# Altium PCB PCB1.PcbDoc
Units mil, origin at the board's own origin, x right, y up, seen from the top; angles counter-clockwise.
Board outline 2165.35 x 6102.36 mil, 2 copper layers (Top Layer, Bottom Layer); 142 components, 117 nets, 421 pads, 346 vias.
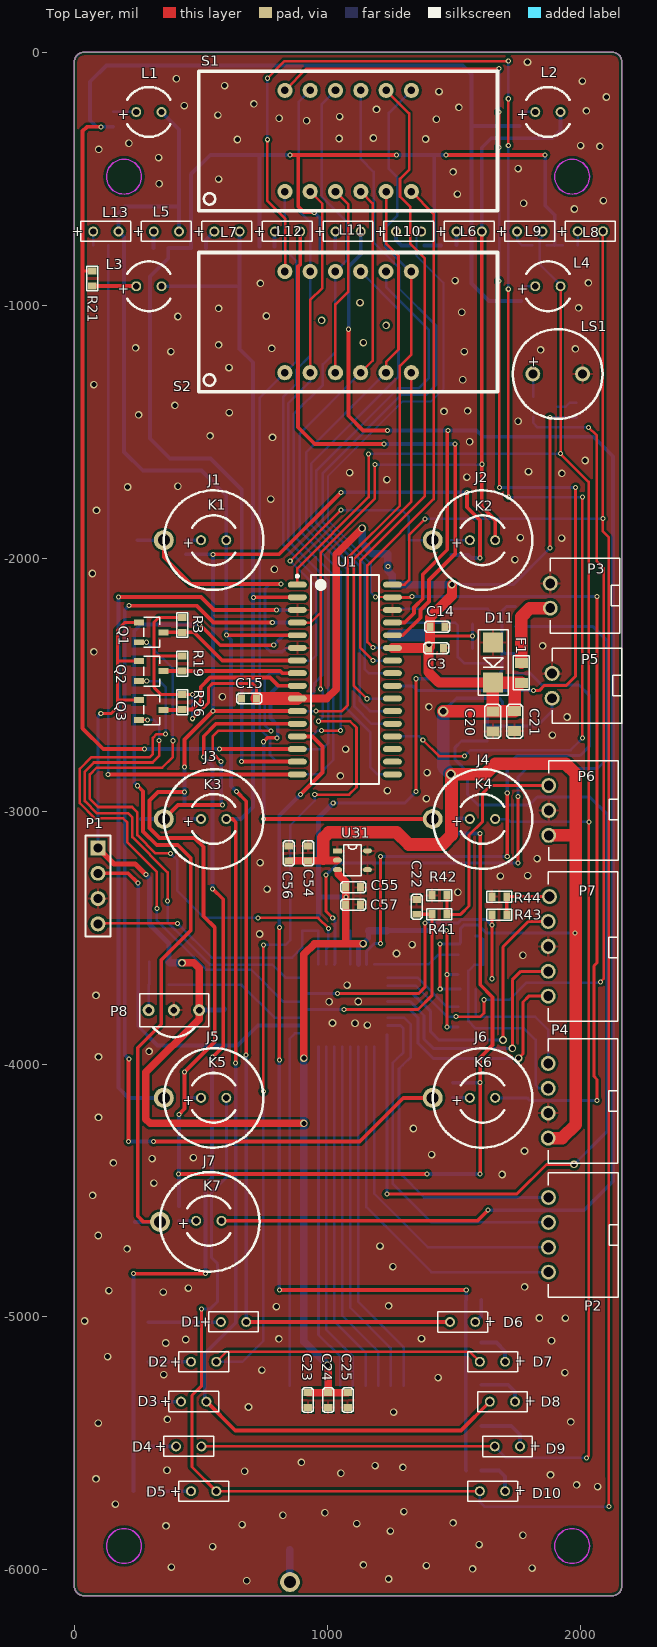
[diagram p0: Top Layer view]
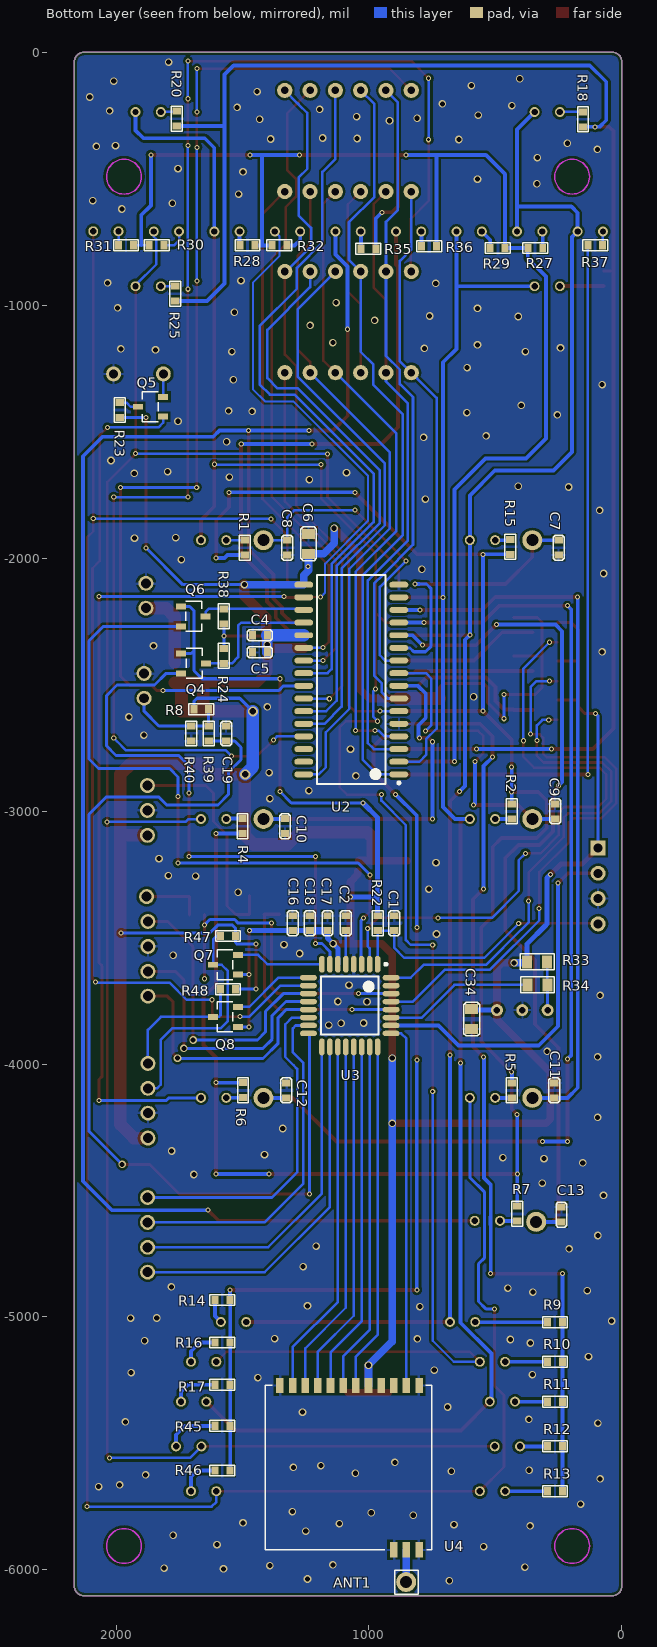
[diagram p1: Bottom Layer view, seen from below]

## Layer stack, top to bottom
Top Layer: signal copper 1.4
Dielectric: dielectric 12.6, FR-4, Dk 4.8
Bottom Layer: signal copper 1.4

## Board outline
0,-6062.99 ccw(c39.37,-6062.99) 39.37,-6102.36 2125.98,-6102.36 ccw(c2125.98,-6062.99) 2165.35,-6062.99 2165.35,-6062.65 2165.35,-39.37 ccw(c2125.98,-39.37) 2125.98,0 39.37,0 ccw(c39.37,-39.37) 0,-39.37

## Design rules (kind name [scope] priority, off if disabled: settings)
Clearance [All] p1: gap=10
PolygonConnect PolygonConnect_1 [isvia] p1: connectstyle=Direct reliefconductorwidth=10 reliefentries=4 polygonreliefangle="90 Angle"
PolygonConnect [All] p2: connectstyle=Relief reliefconductorwidth=10 reliefentries=4 polygonreliefangle="90 Angle"
RoutingVias [All] p1: holewidth=28 width=50 viastyle="Through Hole" minholewidth=28 minwidth=50 maxholewidth=28 maxwidth=50
SilkscreenOverComponentPads [All] p1: minsilkscreentomaskgap=0
SolderMaskExpansion [All] p1: expansion=4
Width [All] p1: maxlimit=200 minlimit=6 preferedwidth=10 minimp=50.000000 maximp=50.000000 favimp=50.000000
27 further rules are at their usual default settings.

## Classes and differential pairs
component class RF: ANT1 C23 C24 C25 C34 C54 C55 C56 C57 P8 R33 R34 U4 U31
component class MCU: C1 C2 C16 C17 C18 P1 R22 U3
component class LED: C3 C14 C15 D1 D2 D3 D4 D5 D6 D7 D8 D9 D10 K1 K2 K3 K4 K5 K6 K7 L1 L2 L3 L4 L5 L6 L7 L8 L9 L10 L11 L12 L13 Q1 Q2 Q3 R1 R2 R3 R4 R5 R6 R7 R9 R10 R11 R12 R13 R14 R15 R16 R17 R18 R19 R20 R21 R25 R26 R27 R28 R29 R30 R31 R32 R35 R36 R37 R45 R46 U1
component class INTERFACE: C19 C20 C21 C22 D11 F1 P2 P3 P4 P5 P6 P7 Q7 Q8 R8 R39 R40 R41 R42 R43 R44 R47 R48
component class TouchPad: C4 C5 C6 C7 C8 C9 C10 C11 C12 C13 J1 J2 J3 J4 J5 J6 J7 LS1 Q1 Q4 Q6 R23 R24 R38 S1 S2 U2

## Components (designator, comment, footprint, x,y, rotation, side; value= is the part's Value field where it differs from the comment)
ANT1 "TP" ANT_TH 853,-6048 r270 bottom
C1 "0.1uF/16V" 0603C 901,-3473 r90 bottom
C2 "2.2uF/6.3V" 0603C 1092,-3413.94 r270 bottom
C3 "0.1uF/16V" 0603C 1401,-2356 r0 top
C4 "0.1uF/16V" 0603C 1402.13,-2305 r0 bottom
C5 "0.01uF/16V" 0603C 1402.13,-2373 r0 bottom
C6 "22uF/16V" 0805C 1239,-1983 r90 bottom
C7 "10PF/16V" 0603C 250,-1988 r90 bottom
C8 "10PF/16V" 0603C 1323,-1988 r90 bottom
C9 "10PF/16V" 0603C 264,-2972 r270 bottom
C10 "10PF/16V" 0603C 1332,-3089.06 r90 bottom
C11 "10PF/16V" 0603C 267,-4075 r270 bottom
C12 "10PF/16V" 0603C 1327,-4075 r270 bottom
C13 "10PF/16V" 0603C 239,-4566 r270 bottom
C14 "0.1uF/16V" 0603C 1406,-2271 r0 top
C15 "10uF/16V" 0603C 721,-2555 r180 top
C16 "0.1uF/16V" 0603C 1302,-3473 r90 bottom
C17 "0.1uF/16V" 0603C 1164,-3473 r90 bottom
C18 "10uF/16V" 0603C 1235,-3473 r90 bottom
C19 "0.1uF/16V" 0603C 1565,-2723.06 r90 bottom
C20 "22uF/16V" 0805C 1655,-2606 r270 top
C21 "10uF/16V" 0805C 1741,-2605 r270 top
C22 "0.1uF/16V" 0603C 1354,-3408 r90 top
C23 "0.1uF/16V" 0603C 924,-5299 r270 top
C24 "0.10uF/16V" 0603C 1004,-5299 r270 top
C25 "10uF/16V" 0603C 1081,-5299 r270 top
C34 "22uF/16V" 0805C 594,-3783 r270 bottom
C54 "0.1uF/10V" 0603C 925,-3197 r90 top
C55 "0.1uF/10V" 0603C 1073,-3302 r0 top
C56 "10uF/10V" 0603C 849,-3138 r270 top
C57 "10uF/10V" 0603C 1132,-3370 r180 top
D1 "LED0" LED_DIP_257MM 579.92,-5019.68 r0 top locked
D2 "LED0" LED_DIP_257MM 461.81,-5177.17 r0 top locked
D3 "LED0" LED_DIP_257MM 422.44,-5334.65 r0 top locked
D4 "LED0" LED_DIP_257MM 402.76,-5511.81 r0 top locked
D5 "LED0" LED_DIP_257MM 461.81,-5688.98 r0 top locked
D6 "LED0" LED_DIP_257MM 1585.43,-5019.68 r180 top locked
D7 "LED0" LED_DIP_257MM 1703.54,-5177.17 r180 top locked
D8 "LED0" LED_DIP_257MM 1742.91,-5335 r180 top locked
D9 "LED0" LED_DIP_257mm 1762.6,-5511.81 r180 top locked
D10 "LED0" LED_DIP_257mm 1703.54,-5688.98 r180 top locked
D11 "SMA6.5CA" SMA 1656,-2334 r270 top
F1 "500mA" 0805R 1768,-2493 r90 top
J1 "TP" TOUCHU_PAD 551.18,-1929.13 r0 top locked
J2 "TP" TOUCHU_PAD 1614.17,-1929.13 r0 top locked
J3 "TP" TOUCHU_PAD 551.18,-3031.5 r0 top locked
J4 "TP" TOUCHU_PAD 1614.17,-3031.5 r0 top locked
J5 "TP" TOUCHU_PAD 551.18,-4133.86 r0 top locked
J6 "TP" TOUCHU_PAD 1614.17,-4133.86 r0 top locked
J7 "TP" TOUCHU_PAD 536,-4624 r0 top locked
K1 "LED0" LED_DIP_5MM 501.18,-1929.13 r0 top locked
K2 "LED0" LED_DIP_5MM 1564.17,-1929.13 r0 top locked
K3 "LED0" LED_DIP_5MM 501.18,-3031.5 r0 top locked
K4 "LED0" LED_DIP_5MM 1564.17,-3031.5 r0 top locked
K5 "LED0" LED_DIP_5MM 501.18,-4133.86 r0 top locked
K6 "LED0" LED_DIP_5MM 1564.17,-4133.86 r0 top locked
K7 "LED0" LED_DIP_5MM 482,-4620 r0 top
L1 "LED0" LED_DIP_5mm 245.28,-236.22 r0 top locked
L2 "LED0" LED_DIP_5mm 1822.83,-236.22 r0 top locked
L3 "LED0" LED_DIP_5mm 245.28,-925.2 r0 top locked
L4 "LED0" LED_DIP_5mm 1822.83,-925.2 r0 top locked
L5 "LED0" LED_DIP_257MM 314.57,-708.66 r0 top locked
L6 "LED0" LED_DIP_257MM 1511.42,-708.66 r0 top locked
L7 "LED0" LED_DIP_257MM 553.94,-708.66 r0 top
L8 "LED0" LED_DIP_257MM 1750.79,-708.66 r0 top locked
L9 "LED0" LED_DIP_257MM 1990.16,-708.03 r0 top locked
L10 "LED0" LED_DIP_257MM 1272.05,-708.66 r0 top
L11 "LED0" LED_DIP_257MM 1032.68,-708.66 r0 top
L12 "LED0" LED_DIP_257MM 793.31,-708.66 r0 top
L13 "LED0" LED_DIP_257MM 75.2,-708.66 r0 top locked
LS1 "Buzzer" BUFFER_0905 1813,-1272 r0 top
P1 "Header 4" HDR1X4 94,-3146 r270 top
P2 "Header 4" 4-2.5MM-W 1875,-4823 r90 top
P3 "Header 2" 2-2.5MM-W 1882,-2198 r90 top
P4 "Header 4" 4-2.5MM-W 1874,-4293 r90 top
P5 "Header 2" 2-2.5MM-W 1889,-2554 r90 top
P6 "Header 3" 3-2.5MM-W 1876,-3096 r90 top
P7 "Header 5" 5-2.5MM-W 1874,-3732 r90 top
P8 "VS1838B" VS1838B 294,-3787 r0 top
Q1 "SI2306." SOT23-3 255.31,-2253.91 r180 top
Q2 "HY0320" SOT23-3 255.31,-2407.46 r180 top
Q3 "HY0320" SOT23-3 255.31,-2561 r180 top
Q4 "SI2306." SOT23-3 1742.43,-2377 r0 bottom
Q5 "S8050" SOT23-3 1814,-1441 r180 bottom
Q6 "SI2306." SOT23-3 1744,-2191 r0 bottom
Q7 "SI2306." SOT23-3 1518,-3647 r180 bottom
Q8 "SI2306." SOT23-3 1518,-3853 r180 bottom
R1 "1.5K" 0603R 1491,-1928.94 r270 bottom
R2 "1.5K" 0603R 436,-3031.06 r90 bottom
R3 "10K" 0603R 428,-2235 r270 top
R4 "1.5K" 0603R 1500,-3030 r270 bottom
R5 "1.5K" 0603R 435,-4134 r90 bottom
R6 "1.5K" 0603R 1498,-4133.06 r90 bottom
R7 "1.5K" 0603R 414,-4621 r90 bottom
R8 "100K" 0603R 1692.65,-2598 r180 bottom
R9 "1.5K" 0603R 294,-5021 r180 bottom
R10 "1.5K" 0603R 294,-5177 r180 bottom
R11 "1.5K" 0603R 294,-5335 r180 bottom
R12 "1.5K" 0603R 294,-5512 r180 bottom
R13 "1.5K" 0603R 294,-5689 r180 bottom
R14 "1.5K" 0603R 1609,-4933 r180 bottom
R15 "1.5K" 0603R 441,-1926 r270 bottom
R16 "1.5K" 0603R 1609,-5101 r180 bottom
R17 "1.5K" 0603R 1609,-5268 r180 bottom
R18 "1.5K" 0603R 154,-236 r270 bottom
R19 "10K" 0603R 428,-2387.5 r270 top
R20 "1.5K" 0603R 1760,-233 r270 bottom
R21 "1.5K" 0603R 72,-924 r90 top
R22 "10K" 0603R 965.65,-3473 r90 bottom
R23 "1K" 0603R 1985,-1444 r90 bottom
R24 "4.7K" 0603R 1574,-2416 r90 bottom
R25 "1.5K" 0603R 1766,-925 r270 bottom
R26 "10K" 0603R 428,-2540 r270 top
R27 "1.5K" 0603R 313,-774 r0 bottom
R28 "1.5K" 0603R 1510,-763 r180 bottom
R29 "1.5K" 0603R 521,-774 r180 bottom
R30 "1.5K" 0603R 1810,-763 r0 bottom
R31 "1.5K" 0603R 1990,-763 r180 bottom
R32 "1.5K" 0603R 1325,-764 r0 bottom
R33 "10K" 0805R 296,-3596 r0 bottom
R34 "100" 0805R 294.26,-3687 r0 bottom
R35 "1.5K" 0603R 1032,-777 r180 bottom
R36 "1.5K" 0603R 792,-768 r180 bottom
R37 "1.5K" 0603R 76,-763 r0 bottom
R38 "4.7K" 0603R 1574,-2201 r270 bottom
R39 "100" 0603R 1633.65,-2723.06 r90 bottom
R40 "100K" 0603R 1702.65,-2664 r270 bottom
R41 "100" 0603R 1414,-3408.35 r0 top
R42 "100K" 0603R 1473,-3333 r180 top
R43 "100" 0603R 1651,-3410 r0 top
R44 "100K" 0603R 1710,-3338 r180 top
R45 "1.5K" 0603R 1609,-5431 r180 bottom
R46 "1.5K" 0603R 1609,-5607 r180 bottom
R47 "4.7K" 0603R 1587,-3494 r180 bottom
R48 "4.7K" 0603R 1587,-3704 r180 bottom
S1 "SEG_4_0.36" DISPLAY_0.36INCH_4 833,-151 r0 top locked
S2 "SEG_4_0.36" DISPLAY_0.36INCH_4 832.68,-867 r0 top locked
U1 "TM1629A" SOP127P1040X265-32N 1070,-2480 r0 top
U2 "TM1648A" SOP127P1040X265-32N 1070,-2480 r0 bottom
U3 "STM8S003K3T6C" QFP80P900X900X245-32N 1076,-3769 r270 bottom
U4 "HW3000" HW3000 802,-5271 r270 bottom
U31 "TLV70433DBVT" SOT23-5(DBV) 1041,-3157 r0 top

## Footprints (in the part's own frame and the unit in brackets; to place one, negate y for a bottom-side part, rotate by r counter-clockwise, add the part's x,y. Pads: shape width x height; smd on the part's side, far side on the other; paste and mask are expansions set on the pad)
2-2.5MM-W [mm]
  round 1.5 hole 1: 1(0,0) 2(2.5,0)
  silkscreen extent -2.5,-7 5,0
3-2.5MM-W [mm]
  round 1.5 hole 1: 1(0,0) 2(2.5,0) 3(5,0)
  silkscreen extent -2.5,-7 7.5,0
4-2.5MM-W [mm]
  round 1.5 hole 1: 1(0,0) 2(2.5,0) 3(5,0) 4(7.5,0)
  silkscreen extent -2.5,-7 10,0
5-2.5MM-W [mm]
  round 1.5 hole 1: 1(0,0) 2(2.5,0) 3(5,0) 4(7.5,0) 5(10,-0.127)
  silkscreen extent -2.5,-7 12.5,0
0603C [mm]
  rect 0.7x0.85 smd: 1(0,0) 2(1.5,0)
  silkscreen extent -0.5,-0.55 2,0.55
0603R [mm]
  rect 0.7x0.85 smd: 1(0,0) 2(1.5,0)
  silkscreen extent -0.5,-0.55 2,0.55
0805C [mm]
  rect 1x1.3 smd: 1(0,0) 2(2,0)
  silkscreen extent -0.7,-0.8 2.7,0.8
0805R [mm]
  rect 1x1.3 smd: 1(0,0) 2(2,0)
  silkscreen extent -0.7,-0.8 2.7,0.8
ANT_TH [mm]
  round 2 hole 1.2: 1(0,0)
  silkscreen extent -1.19,-1.17 1.24,1.19
BUFFER_0905 [mm]
  round 1.5 hole 0.9: 1(0,0) 2(5,0)
  silkscreen extent -2,-4.5 7,4.5
DISPLAY_0.36INCH_4 [mil]
  round 60 hole 30: 1(0,-400) 2(100,-400) 3(200,-400) 4(300,-400) 5(400,-400) 6(500,-400) 7(500,0) 8(400,0) 9(300,0) 10(200,0) 11(100,0) 12(0,0)
  silkscreen extent -341,-476 841,76
HDR1X4 [mm] "Connector; Header; 4 Position"
  rect 1.5x1.5 hole 0.9: 1(0,0)
  round 1.5 hole 0.9: 2(2.54,0) 3(5.08,0) 4(7.62,0)
  silkscreen extent -1.27,-1.27 8.89,1.27
HW3000 [mil]
  rect 60x30 smd: 1(0,0) 2(0,-50) 3(0,-100) 4(0,-150) 5(0,-200) 6(0,-250) 7(0,-300) 8(0,-350) 9(0,-400) 10(0,-450) 11(0,-500) 12(0,-550) 13(649.61,-100) 14(649.61,-50) 15(649.61,0)
  silkscreen extent 0,-607 650,50
LED_DIP_5MM [mm]
  round 1 hole 0.635: 1(0,0) 2(2.54,0)
  silkscreen extent -0.9,-2.5 3.44,2.5
LED_DIP_5mm [mm]
  round 1 hole 0.635: 1(0,0) 2(2.54,0)
  silkscreen extent -0.9,-2.5 3.44,2.5
LED_DIP_257MM [mm]
  round 1 hole 0.635: 1(0,0) 2(2.54,0)
  silkscreen extent -1.24,-1 3.77,1.02
LED_DIP_257mm [mm]
  round 1 hole 0.635: 1(0,0) 2(2.54,0)
  silkscreen extent -1.24,-1 3.77,1.02
QFP80P900X900X245-32N [mm] "QFP, 32-Leads, Body 9.2x9.2mm (max), Pitch 0.80mm, IPC Medium Density"
  oval 1.7x0.55 smd: 1(-4.15,2.8) 2(-4.15,2) 3(-4.15,1.2) 4(-4.15,0.4) 5(-4.15,-0.4) 6(-4.15,-1.2) 7(-4.15,-2) 8(-4.15,-2.8) 17(4.15,-2.8) 18(4.15,-2) 19(4.15,-1.2) 20(4.15,-0.4) 21(4.15,0.4) 22(4.15,1.2) 23(4.15,2) 24(4.15,2.8)
  oval 0.55x1.7 smd: 9(-2.8,-4.15) 10(-2,-4.15) 11(-1.2,-4.15) 12(-0.4,-4.15) 13(0.4,-4.15) 14(1.2,-4.15) 15(2,-4.15) 16(2.8,-4.15) 25(2.8,4.15) 26(2,4.15) 27(1.2,4.15) 28(0.4,4.15) 29(-0.4,4.15) 30(-1.2,4.15) 31(-2,4.15) 32(-2.8,4.15)
  silkscreen extent -4.27,-2.9 2.9,3.75, body extent -3.5,-3.5 3.5,3.5, height 2.45
SMA [mm]
  rect 2x2 smd: 1(0,0) 2(4,0)
  silkscreen extent -1.3,-1.5 5.3,1.5
SOP127P1040X265-32N [mm] "SOP, 32-Leads, Body 21.0x7.6mm (max), Pitch 1.27mm, IPC Medium Density"
  oval 1.9x0.6 smd: 1(-4.775,9.525) 2(-4.775,8.255) 3(-4.775,6.985) 4(-4.775,5.715) 5(-4.775,4.445) 6(-4.775,3.175) 7(-4.775,1.905) 8(-4.775,0.635) 9(-4.775,-0.635) 10(-4.775,-1.905) 11(-4.775,-3.175) 12(-4.775,-4.445) 13(-4.775,-5.715) 14(-4.775,-6.985) 15(-4.775,-8.255) 16(-4.775,-9.525) 17(4.775,-9.525) 18(4.775,-8.255) 19(4.775,-6.985) 20(4.775,-5.715) 21(4.775,-4.445) 22(4.775,-3.175) 23(4.775,-1.905) 24(4.775,-0.635) 25(4.775,0.635) 26(4.775,1.905) 27(4.775,3.175) 28(4.775,4.445) 29(4.775,5.715) 30(4.775,6.985) 31(4.775,8.255) 32(4.775,9.525)
  silkscreen extent -4.9,-10.5 3.42,10.5, body extent -3.81,-10.49 3.81,10.49, height 2.65
SOT23-3 [mm]
  rect 1x0.6 smd: 1(0,0) 2(0,2) 3(-2.5,1)
  silkscreen extent -2.1,-0.5 -0.5,2.5
SOT23-5(DBV) [mm]
  rect 0.9x0.5 smd: 1(0,0)
  oval 0.9x0.5 smd: 2(0,-0.95) 3(0,-1.9) 4(3,-1.9) 5(3,0)
  silkscreen extent 0.6,-2.5 2.4,0.6
TOUCHU_PAD [mm]
  round 2 hole 1.2: 1(-5,0)
  silkscreen extent -5,-5 5,5
VS1838B [mm]
  round 1.2 hole 0.65: 1(0,0) 2(2.54,0) 3(5.08,0)
  silkscreen extent -0.89,-2.71 6.02,1.65

## Part data
C1 C2 C3 C4 C5 C6 C7 C8 C9 C10 C11 C12 C13 C14 C15 C16 C17 C18 C19 C20 C21 C22 C23 C24 C25 C54 C55 C56 C57: library part Cap, "Capacitor"
C34: library part Cap2, "Capacitor"
D1 D2 D3 D4 D5 D6 D7 D8 D9 D10 K1 K2 K3 K4 K5 K6 K7 L1 L2 L3 L4 L5 L6 L7 L8 L9 L10 L11 L12 L13: "Typical INFRARED GaAs LED"
D11: library part "D Schottky", "Schottky Diode"
F1: library part "Fuse 1", "Fuse"
J1 J2 J3 J4 J5 J6 J7: library part TOUCH_PAD, "TEST_3P"
LS1: "Magnetic Transducer Buzzer"
P1 P2 P4: "Header, 4-Pin"
P3 P5: "Header, 2-Pin"
P6: "Header, 3-Pin"
P7: "Header, 5-Pin"
P8: library part "Header 3", "Header, 3-Pin"
Q1 Q2 Q3 Q4 Q6 Q7 Q8: library part BUK92150-55A, "BUK92150-55A"
Q5: library part NPN, "NPN Bipolar Transistor"
R1 R2 R4 R5 R6 R7 R8 R9 R10 R11 R12 R13 R14 R15 R16 R17 R18 R20 R21 R22 R23 R24 R25 R27 R28 R29 R30 R31 R32 R35 R36 R37 R38 R39 R40 R41 R42 R43 R44 R45 R46 R47 R48: library part Res1, "Resistor"
R3 R19 R26: library part Res2, "Resistor"
R33 R34: library part R, "R"
U31: library part TPS76318

## Via types
v1: diameter 30, hole 20, Top Layer to Bottom Layer, tented both sides, 188 vias
v2: diameter 20, hole 12, Top Layer to Bottom Layer, tented both sides, 156 vias
v3: diameter 40, hole 25, Top Layer to Bottom Layer, tented both sides, 2 vias

## Nets (pads, with @x,y where several pads share a name; then routed paths per layer and width w, separated by ;. In a path a pad name is that pad's centre, name@x,y a point inside that pad or via, vN(x,y) a via of type N, cw(c..) or ccw(c..) an arc to the next point about the centre after c; other vN are vias at no path point)
AD: C19.1 R39.1 U3.16 | length 3813.1
  Top Layer w12: v2(1236,-4514) 1750,-4514 1867,-4397 v1(1976,-4397)
  Bottom Layer w12: v2(1236,-4514) U3.16@1236,-3882.62 ; R39.1 C19.1 1530.94,-2723.06 1506,-2748 1506,-2797 1555,-2846 1555,-2934 1597,-2976 1799.68,-2976 1831,-2944.68 2038.68,-2944.68 2107,-3013 2107,-4266 v1(1976,-4397)
BUZZER: Q5.1 U3.10 | length 3453.5
  Top Layer w10: v2(1510,-3813) 1606,-3813 1620,-3799 v2(1620,-3746) ; v2(2034,-1483) 2065,-1514 2065,-2012 2093,-2040 2093,-3663 v2(2081,-3675)
  Bottom Layer w10: U3.10 1350.26,-3690.26 1473,-3813 v2(1510,-3813) ; v2(1620,-3746) 1721,-3746 1788.9,-3678.1 2077.9,-3678.1 v2(2081,-3675) ; Q5.1 1814,-1465 1832,-1483 v2(2034,-1483)
CLK: Q2.2 U3.29 | length 2257.2
  Top Layer w10: Q2.2 v2(286.8,-2486.2) ; v2(327,-3386) 327,-3349 ; 327,-3363 327,-3349 ; v2(361,-2695) 360,-2696 325.64,-2696 311,-2710.64 311,-2774 297,-2788 67,-2788 22,-2833 22,-2968.57 82.43,-3029 193.96,-3029 209.96,-3045 209.96,-3123.96 327,-3241 327,-3349
  Bottom Layer w10: v2(286.8,-2486.2) 337.2,-2486.2 361,-2510 v2(361,-2695) ; v2(327,-3386) 327,-3432 522,-3627 700,-3627 826.25,-3753.25 U3.29
DIG1: S1.6 U2.22 | length 2033.1
  Top Layer w10: v2(1181,-2354) 1159,-2332 1159,-2175 1159,-2029 1421,-1767 1421,-639 S1.6
  Bottom Layer w10: v2@1182,-2355 U2.22
DIG2: S1.8 U2.23 | length 2549.7
  Top Layer w10: v2(1181,-2405) 1131,-2355 1131,-2010 1385,-1756 1385,-814 1329,-758 1329,-612 1288,-571 1288,-501 1324,-465 1324,-242 S1.8
  Bottom Layer w10: v2(1181,-2405) U2.23
DIG3: S1.9 U2.24 | length 2841
  Bottom Layer w10: S1.9 1133,-422 1184,-473 1184,-751.28 1285,-852.28 1285,-935 1432,-1082 1432,-1314 1392,-1354 1294,-1354 982,-1666 982,-1830 982,-1857.72 1148,-2023.72 1148,-2179 1148,-2439 1164,-2455 U2.24
DIG4: S1.12 U2.25 | length 4341.1
  Top Layer w10: S1.12 919,-65 v2(1680,-65) ; v2@1680,-1720 v2(1680,-905) ; v2(1680,-376) v2(1680,-237)
  Top Layer w12: v2(1815,-2524) 1838,-2524 1859,-2503 1946,-2503 1982,-2467 1982,-2182 v2(1982,-1720)
  Bottom Layer w10: v2(1680,-905) v2(1680,-376) ; v2(1680,-237) v2(1680,-65)
  Bottom Layer w12: U2.25 1338,-2505 1357,-2524 v2(1815,-2524) ; v2(1681,-1720) v2(1982,-1720)
DIG5: S2.6 U2.26 | length 1533.3
  Top Layer w10: v2(1157,-2556) 1106,-2505 1106,-2031 1106,-2003 1332.68,-1776.32 1332.68,-1749.32 ; 1332.68,-1720 1332.68,-1749.32 ; S2.6 1332.68,-1749.32
  Bottom Layer w10: v2(1157,-2556) U2.26@1256.99,-2556
DIG6: S2.8 U2.27 | length 2216.1
  Bottom Layer w10: S2.8 1232.68,-928.68 1402,-1098 1402,-1288 1361,-1329 1281,-1329 957,-1653 957,-1826 957,-1861 1128,-2032 1128,-2146 1128,-2564 1169,-2605 U2.27
DIG7: S2.9 U2.28 | length 2173.7
  Bottom Layer w10: S2.9 1282,-1016.32 1282,-1281.32 937,-1626.32 937,-1870 1108,-2041 1108,-2487 1108,-2587 1176,-2655 U2.28
DIG8: S2.12 U2.29 | length 5557.3
  Top Layer w10: v2(764,-346) 764,-588 835,-659 835,-864.68 S2.12 ; v2(764,-103) 832,-35 v2(1716,-35) ; v2(1378,-2719) 1442,-2783 v2(1543,-2783) ; v2(1716,-1759) v2(1716,-937) ; v2(1716,-368) v2(1716,-184) ; v2(2009,-2712) v2(2009,-1759)
  Bottom Layer w10: v2(764,-346) v2(764,-103) ; U2.29 1364,-2705 v2(1378,-2719) ; v2(1543,-2783) 1567,-2759 1962,-2759 1997,-2724 v2(2009,-2712) ; v2(1716,-1759) v2(2009,-1759) ; v2(1716,-937) v2(1716,-368) ; v2(1716,-184) v2(1716,-35)
DIO: Q1.2 U3.2 | length 2404.2
  Top Layer w10: Q1.2 v2@282,-2332.65 ; v2(381,-3167) 322,-3167 249.96,-3094.96 249.96,-3005 228.96,-2984 94,-2984 62,-2952 62,-2855 89,-2828 348,-2828 390,-2786 v2(390,-2722) ; v2(727,-3422) 964,-3422 1007,-3465 v2(1005,-3465)
  Bottom Layer w10: v2(286,-2332.65) 390,-2436.65 v2(390,-2722) ; v2(381,-3167) 408,-3194 408,-3316 514,-3422 v2(727,-3422) ; U3.2 997.26,-3542.74 1005,-3535 v2(1005,-3465)
FEED: R43.1 U3.30 | length 1270.6
  Top Layer w12: v2(1041.24,-3721.76) 1361.24,-3721.76 1386,-3697 v2(1386,-3443) ; v2(1651,-3663) v2(1651,-3451) R43.1
  Bottom Layer w12: U3.30 v2(1041.24,-3721.76) ; v2(1386,-3443) 1516.83,-3443 1530.83,-3429 1629,-3429 v2(1651,-3451)
GND: C1.2 C2.1 C3.2 C4.2 C5.2 C6.2 C7.1 C8.1 C9.1 C10.1 C11.1 C12.1 C13.1 C14.2 C15.2 C16.2 C17.2 C18.2 C19.2 C20.2 C21.2 C22.2 C23.2 C24.2 C25.2 C34.2 C54.2 C55.2 C56.1 C57.1 D11.1 LS1.2 P1.3 P3.2 P4.2 P5.2 P6.2 P7.3 P8.2 R40.2 R42.2 R44.2 U1.3 U1.6 U1.30 U2.5 U2.16 U3.4 U4.1 U4.12 U4.13 U4.15 U31.1 U31.4 U31.5
  other v1: 682,-6043 1243,-6036 1575,-5996 1810,-5993 384,-5989 1392,-5983 1143,-5980 547,-5908 1601,-5900 1774,-5863 1250,-5847 363,-5826 664,-5821 1117,-5817 1498,-5814 825,-5784 991,-5774 1303,-5770 163,-5740 2069,-5671 1986,-5664 86,-5640 1883,-5624 1054,-5618 674,-5610 367,-5606 1299,-5595 1190,-5588 898,-5575 95,-5420 1963,-5415 368,-5405 1263,-5376 689,-5356 1439,-5240 354,-5228 1940,-5220 742,-5210 132,-5157 362,-5103 1887,-5094 441,-5089 809,-5087 1373,-5086 41,-5016 1942,-5005 1839,-5004 799,-4959 1243,-4956 352,-4902 137,-4896 451,-4886 1781,-4881 1260,-4801 209,-4731 1209,-4720 95,-4678 73,-4519 315,-4471 1692,-4437 155,-4391 308,-4374 471,-4370 1413,-4358 1780,-4344 1341,-4255 96,-4211 96,-3972 296,-3950 1159,-3846 1110,-3839 1021,-3838 1008,-3754 1123,-3753 86,-3729 1079,-3688 1774,-3570 1274,-3563 1336,-3528 733,-3486 1517,-3321 763,-3309 1685,-3257 1793,-3255 735,-3204 1830,-3188 1392,-2951 1238,-2919 1052,-2861 1395,-2848 1073,-2755 1890,-2700 1949,-2628 1402,-2588 586,-2548 78,-2371 1852,-2347 72,-2061 791,-2044 1742,-2006 1927,-1921 1764,-1919 88,-1811 777,-1767 211,-1719 410,-1716 1236,-1690 1552,-1680 1928,-1665 1089,-1662 1796,-1658 2020,-1614 1563,-1540 784,-1523 537,-1517 1755,-1459 255,-1434 613,-1425 1462,-1420 1555,-1418 398,-1396 78,-1314 1536,-1295 612,-1247 382,-1184 1542,-1184 1844,-1177 1981,-1173 781,-1171 243,-1169 571,-1157 410,-1045 760,-1043 1532,-1028 571,-1013 1994,-1011 736,-914 2033,-912 1506,-903 1977,-620 1777,-597 2092,-587 1515,-561 336,-520 571,-502 1498,-473 1755,-460 334,-417 97,-384 2078,-372 2002,-369 216,-360 645,-345 1389,-343 1047,-341 1183,-339 919,-271 1432,-265 810,-261 1049,-255 568,-249 2025,-232 1195,-226 1521,-218 435,-211 710,-204 2104,-177 1442,-156 595,-132 2009,-114 404,-105 1792,-39
IN: C22.1 R41.1 U3.28 | length 906.1
  Top Layer w12: v2(1067.25,-3784.75) 1359.25,-3784.75 1413.65,-3730.35 R41.1@1413.65,-3408 ; C22.1 R41.1@1413.65,-3408 ; R41.1 R41.1@1413.65,-3408
  Bottom Layer w12: U3.28 v2(1067.25,-3784.75)
IRLED: R34.2 U3.27 | length 593.1
  Bottom Layer w10: R34.2 662,-3687 791.24,-3816.24 U3.27
K3: P2.4 U3.14 | length 1349.7
  Bottom Layer w10: U3.14 1304.24,-3816.24 1331,-3843 1331,-3972 1298,-4005 1284,-4019 1284,-4428 1298.35,-4442.35 ; 1291.08,-4435.08 1383.72,-4527.72 P2.4
K4: P2.2 U3.17 | length 1356.6
  Bottom Layer w10: U3.17 1186.24,-4512.24 1398.57,-4724.57 P2.2
K6: P2.1 U3.18 | length 1460.2
  Bottom Layer w10: U3.18 1154.74,-4565.74 1412,-4823 P2.1
K7: P2.3 U3.15 | length 1376.5
  Bottom Layer w10: U3.15 1289.74,-3847.74 1301,-3859 1301,-3954 1277,-3978 1259,-3996 1259,-4472 1413.15,-4626.15 1505,-4626.15 P2.3
KEY1: C7.2 J1.1 U2.11 | length 1137.1
  Top Layer w15: J1.1 354.33,-1996.33 460,-2102 v2(818,-2102)
  Bottom Layer w12: v2(818,-2102) 773,-2102 754,-2121 754,-2348 776.18,-2370.18 822.82,-2370.18 838,-2355 U2.11@870,-2355
  Bottom Layer w15: C7.2@250.19,-1929.13 J1.1 ; 802,-2102 v2(818,-2102) ; U2.11@870,-2355 U2.11
KEY2: C8.2 J2.1 U2.10 | length 1248.6
  Top Layer w10: v2(854,-2011) v2(1055,-1810)
  Bottom Layer w10: v2(854,-2011) 957,-2114 957,-2384 936,-2405 U2.10 ; v2(1055,-1810) 1295,-1810 1323,-1838 C8.2 1417.13,-1928.94 J2.1
KEY3: C9.2 J3.1 U2.9 | length 1224.8
  Top Layer w10: v2(581,-2804) 548,-2771 548,-2704 569,-2683 v2@777.3,-2683
  Top Layer w15: J3.1 409.83,-2976 v2(586,-2976)
  Bottom Layer w10: v2(777.3,-2683.3) 753,-2659 753,-2477 775,-2455 U2.9
  Bottom Layer w15: C9.2@264.44,-3031.5 J3.1 ; v2(581,-2804) 581,-2971 v2(586,-2976)
KEY4: C10.2 J4.1 U2.8 | length 1423.8
  Top Layer w15: v2(749,-2726) 764.5,-2710.5 v2(801,-2710.5) ; v2@749.5,-3031.5 J4.1
  Bottom Layer w15: v2(748.03,-3031.5) 749,-3030.53 v2(749,-2726) ; v2(801,-2710.5) 804.8,-2706.7 804.8,-2660.8 775.5,-2631.5 775.5,-2535.5 806,-2505 U2.8 ; C10.2@1333.5,-3031.5 J4.1
KEY5: C13.2 J7.1 U2.12 | length 3473.8
  Top Layer w15: v2(251,-2900) 272.46,-2921.46 272.46,-3080.46 326,-3134 409,-3134 461,-3186 461,-3472 344,-3589 344,-3668 ; J7.1 274,-4624 251,-4601 251,-3935.96 344,-3842.96 344,-3668 ; 344,-3637 344,-3668 ; v2(496,-2263) 577.18,-2344.18 v2(788.82,-2344.18)
  Bottom Layer w15: C13.2 J7.1@338.09,-4625.06 ; v2(251,-2900) 237,-2886 237,-2289 263,-2263 v2(496,-2263) ; v2(788.82,-2344.18) 828,-2305 U2.12
KEY6: C12.2 J6.1 U2.13 | length 4444.8
  Top Layer w15: v2(215,-4306) v2@215,-3981 ; 216,-4237 v2(216,-3980) ; v2(216,-2188) 484,-2188 551,-2255 v2(783,-2255) ; v2(314,-4306) 1129,-4306 1301.14,-4133.86 J6.1
  Bottom Layer w15: v2(215,-4306) v2(314,-4306) ; v2(216,-3980) 200,-3964 200,-2204 v2(216,-2188) ; v2(783,-2255) U2.13 ; C12.2 J6.1@1417.13,-4134.06
KEY7: C11.2 J5.1 U2.14 | length 2863.9
  Top Layer w15: v2(175,-2154) 501,-2154 552,-2205 v2(799,-2205)
  Bottom Layer w15: v2(175,-2154) 175,-4094 215.06,-4134.06 C11.2 J5.1@354.13,-4134.06 ; v2(799,-2205) U2.14
LGRID1: D1.2 D6.2 K1.2 L1.2 L5.2 L13.2 U1.5 | length 6616.8
  Top Layer w15: v2@602.36,-2305 U1.5 ; v2(642,-2923) 679.92,-2960.92 v2(679.92,-3964.92) ; D1.2 D6.2
  Bottom Layer w15: L1.2 414.57,-305.51 L5.2 ; 361,-610 304,-610 ; 408.57,-610 304,-610 ; v2(642,-2923) 620,-2901 620,-2322.64 v2(601.18,-2303.82) K1.2 601.18,-1752.18 503,-1654 271,-1654 197,-1580 197,-730.46 L13.2 175.2,-634.8 200,-610 304,-610 ; D1.2 v2(679.92,-3964.92)
LGRID2: D2.2 D7.2 K2.2 L2.2 L6.2 U1.4 | length 7793.6
  Top Layer w10: D2.2 600.98,-5138 1564.38,-5138 D7.2 ; v2(748,-4108) v2(748,-3529) ; U1.4 935,-2255 974,-2216 ; v2(951,-2935) 1087,-2935 1116,-2906 1116,-2670 1091,-2645 v2(966,-2645) ; v2(974,-2517) 974,-2216 ; v2(1189,-1630) 1189,-1705 1189,-1764 974,-1979 974,-2027 974,-2178 974,-2216
  Top Layer w15: L6.2 v2(1611.42,-1629) 1611.42,-1796.42 1664.17,-1849.17 K2.2
  Bottom Layer w10: D2.2 664.83,-5177.17 748,-5094 v2(748,-4108) ; v2(748,-3529) 835,-3529 854,-3510 854,-3056 951,-2959 v2(951,-2935) ; v2(966,-2645) 983,-2628 983,-2593 983,-2526 v2(974,-2517) ; v2(1189,-1630) v2@1611.42,-1630
  Bottom Layer w15: L6.2 1611.42,-377.58 1649,-340 1891.83,-340 1922.83,-309 L2.2
LGRID3: D3.2 D8.2 K3.2 L3.2 L7.2 U1.2 | length 8383.3
  Top Layer w15: D3.2 636.8,-5449 1528.91,-5449 D8.2 ; K3.2 625.5,-3031.5 638.37,-3044.37 638.37,-3219 638.37,-3590 ; v2(638.37,-3996.37) 638.37,-3590 ; 638.37,-3471.37 638.37,-3590 ; v2(708,-2155) U1.2
  Bottom Layer w15: L3.2 653.94,-925.2 ; D3.2 516,-5328.21 516,-5145 638.37,-5022.63 v2(638.37,-3996.37) ; K3.2 659.5,-3031.5 707,-2984 ; L7.2 653.94,-925.2 ; 653.94,-925.2 653.94,-1172.94 707,-1226 ; 707,-2984 707,-2925.68 707,-1226 ; 707,-2984 707,-2155 707,-1226
LGRID4: D4.2 D9.2 K4.2 L4.2 L8.2 U1.1 | length 8245.9
  Top Layer w10: D4.2 D9.2 ; U1.1 882.01,-2040.99 1164,-1759 v2(1164,-1588) ; L4.2 v2(1922.83,-1587) 1922.83,-1588 2034,-1699.17 2034,-5548 v2(2025,-5557)
  Bottom Layer w10: v2(1164,-1588) v2@1922.83,-1588 ; D9.2 1707.79,-5557 v2(2025,-5557) ; K4.2 1713.5,-3031.5 1725,-3043 v2(2035,-3043) ; L8.2 1850.79,-729.54 1840.28,-740.05 1840.28,-838.28 1922.83,-920.83 L4.2
LGRID5: D5.2 D10.2 K5.2 L9.2 U1.32 | length 9387.4
  Top Layer w10: D5.2 D10.2 ; U1.32 1306,-2105 1324,-2087 1324,-1909 v2(1387,-1846) ; L9.2 v2(2090.16,-1844) 2090.16,-1894.16 2113,-1917 2113,-5631 ; v2(2114,-5750) 2114,-5632
  Top Layer w12: v2(504,-4968) 504,-5272 466,-5310 466,-5593.16 D5.2
  Bottom Layer w10: v2@1387,-1844 v2(2090.16,-1844) ; D10.2 1603.54,-5731.54 1622,-5750 v2(2114,-5750)
  Bottom Layer w12: v2(504,-4968) 538,-4968 567,-4939 567,-4790 542.69,-4765.69 542.69,-4507.31 601.18,-4448.82 K5.2
LGRID6: K6.2 L10.2 U1.31 | length 5110.2
  Top Layer w8: v2(1191,-2154) 1256.99,-2154 U1.31
  Top Layer w12: U1.31 v2@1333,-2155 ; v2(2067,-4144) 2067,-4061 2055,-4049 2055,-3612 2067,-3600 v2(2067,-2152)
  Bottom Layer w8: v2(1191,-2154) 1173,-2136 1173,-2100 1173,-2021.85 1004,-1852.85 1004,-1803 1004,-1675 1299,-1380 1411,-1380 1459,-1332 1459,-911 1354,-806 1354,-726.71 L10.2
  Bottom Layer w12: v2(1336,-2152) v2(2067,-2152) ; K6.2 1790.86,-4133.86 1801,-4144 v2(2067,-4144)
LGRID7: K7.2 L11.2 U1.29 | length 7211.1
  Top Layer w15: K7.2 1594,-4620 v2(1636,-4578) ; v2@1084,-1096.35 1084,-1437.36 1141.64,-1495 v2(1238,-1495) ; U1.29 1306.5,-2255 1343.5,-2218 1343.5,-2195.14 ; 1346.74,-2191.91 1377.82,-2160.82 1377.82,-2064.18 1475,-1967 1475,-1648 v2@1475,-1497
  Bottom Layer w15: v2(1085.18,-1095.18) 1085.18,-847.32 1132.68,-799.83 L11.2 ; v2(1238,-1495) v2(1477,-1495) 1591,-1495 1616,-1520 2053,-1520 2130.5,-1597.5 2130.5,-4463.5 2016,-4578 v2(1636,-4578)
LGRID8: L12.2 U1.28 | length 2272.5
  Top Layer w15: L12.2 893.31,-839.2 885.18,-847.32 885.18,-1483.01 951.17,-1549 v2(1225,-1549) ; U1.28@1288,-2305 1299,-2305 1368.5,-2235.5 ; 1368.5,-2230 1368.5,-2205.5 1403,-2171 1403,-2087 1506,-1984 1506,-1691 1506,-1550 v2(1505,-1549)
  Bottom Layer w15: v2(1225,-1549) v2(1505,-1549)
LSEG1: R1.2 R2.2 R4.2 R5.2 R6.2 R7.2 R15.2 U1.11 | length 7847.3
  Top Layer w15: v2(413,-4435) v2(1395,-4435) ; v2(414,-4199) 436,-4177 v2(436,-4031) 556,-3911 556,-3461 511,-3416 511,-3141 476,-3106 337,-3106 297.46,-3066.46 297.46,-2958.54 331,-2925 v2(436,-2925) ; v2(436,-2826) 436,-2716.89 v2(548.94,-2603.94) 880.95,-2603.94 U1.11 U1.11@909.18,-2605 ; v2(548.94,-1985.06) 809.94,-1985.06 v2(1055,-1740) ; U1.11@906,-2605 U1.11@909.18,-2605 ; U1.11@911.5,-2605 U1.11@909.18,-2605 ; v2(1553,-1740) 1553,-1799 1604,-1850 v2(1604,-2000) ; v2(1605,-4435) v2(1605,-4074) 1605,-3974 1654,-3925 1654,-3736 1605,-3687 v2@1605,-3090
  Bottom Layer w15: R7.2 v2(414,-4199) ; R5.2 v2@435,-4032 ; R2.2 v2(436,-2925) v2(436,-2826) ; R15.2 v2(548.94,-1985.06) v2(548.94,-2603.94) ; v2(1055,-1740) v2(1553,-1740) ; v2(1395,-4435) v2(1605,-4435) ; R1.2 1559,-1988 1571,-2000 v2(1604,-2000) ; R6.2 v2(1605,-4074) ; R4.2 v2(1604.06,-3089.06)
LSEG2: R9.2 R10.2 R11.2 R12.2 R13.2 U1.12 | length 3720.3
  Top Layer w15: v2@234.94,-4828.81 v2@519,-4828.81 ; v2(512,-2787) 512,-2704 561,-2655 U1.12 ; v2(547,-3973) 589,-3931 589,-3447 589,-3349 v2@547,-3307
  Bottom Layer w15: R13.2 R12.2 R11.2 R10.2 R9.2 v2(234.94,-4829.06) ; v2(512,-2787) 547,-2822 v2(547,-3308) ; v2(519,-4828) 519,-4635.77 519.19,-4635.59 519.19,-4604.6 519,-4604.41 519,-4476 544.81,-4450.19 544.81,-3975.19 v2(547,-3973)
LSEG3: R14.2 R16.2 R17.2 R45.2 R46.2 U1.13 | length 4332
  Top Layer w15: v2(811,-4893) v2(1549.94,-4893) ; v2(811,-3984) v2(811,-3460) ; U1.13 942,-2705 982,-2745 982,-2847 v2(895,-2934)
  Bottom Layer w15: v2(811,-4893) v2(811,-3984) ; v2(811,-3460) 811,-3221 ; 811,-3183 811,-3221 ; v2(895,-2934) 811,-3018 811,-3221 ; R46.2 R46.2@1548.25,-5605.3 ; v2(1549.94,-4893) R14.2 1548.25,-4934.7 R16.2@1548.25,-5101 ; R46.2@1548.25,-5605.3 R17.2@1548.25,-5268 ; R46.2@1548.25,-5605.3 1548.25,-5431 R17.2@1548.25,-5268 ; R17.2@1548.25,-5268 R16.2@1548.25,-5101 ; R17.2@1548.25,-5268 R16.2@1548.25,-5101
LSEG4: R18.2 R20.2 R21.2 R25.2 U1.14 | length 6401.3
  Top Layer w10: 36.94,-864.94 R21.2
  Top Layer w15: v2@103,-295.06 49.94,-295.06 33,-312 33,-2673 115,-2755 v2(278,-2755) ; v2(575,-2755) U1.14
  Bottom Layer w15: R18.2 v2(106,-295.06) 88.06,-295.06 62,-269 62,-117 127,-52 1535,-52 1571,-88 1571,-292.06 ; v2(278,-2755) v2(575,-2755) ; R20.2 1571,-292.06 ; R25.2 1640.06,-984.06 1571,-915 1571,-292.06
LSEG5: R27.2 R28.2 R29.2 R30.2 R31.2 R32.2 R35.2 R36.2 U1.15 | length 6143.5
  Top Layer w15: v2(662,-2804) 881.01,-2804 U1.15 ; v2(853,-406) 1139,-406 ; 885.5,-438.5 885.5,-448 ; 885.5,-407.5 885.5,-448 ; v2(949,-633) 909,-633 885.5,-609.5 885.5,-448 ; 1206,-406 1139,-406 ; v2(1274,-406) 1139,-406 ; v2(1470,-406) 1818,-406 ; 1846,-406 1818,-406 ; v2(1862,-406) 1818,-406
  Bottom Layer w10: R35.2 R35.2@977.68,-781.73 ; R30.2 1900,-763 R31.2
  Bottom Layer w15: 628.94,-1695.94 608.5,-1675.5 ; v2(662,-2804) 662,-1729 608.5,-1675.5 ; R36.2 732.94,-408.06 ; v2(853,-406) 538,-406 461.94,-482.06 R29.2 R27.2 372.06,-814.94 300,-887 300,-1527 379,-1606 539,-1606 608.5,-1675.5 ; v2(949,-633) 972.94,-656.94 R35.2 ; v2(1274,-406) 1423,-406 ; R32.2 1423,-764 ; 1423,-555 1423,-571 ; R28.2 1449.94,-764 1423,-764 ; v2@1471,-406 v2(1470,-406) 1423,-406 ; v2(1862,-406) 1862,-606 1900,-644 1900,-763 ; 1423,-764 1423,-571 ; 1423,-571 1423,-406
LSEG6: R37.2 U1.16 | length 2830
  Top Layer w15: v2(134,-2855) 145.11,-2855 295,-2855 U1.16
  Bottom Layer w10: 135.06,-2844.94 R37.2
MCU_CS: U3.21 U4.9 | length 1397.3
  Bottom Layer w10: U3.21 1060.25,-4995.25 1202,-5137 U4.9
MCU_IRQ: U3.20 U4.10 | length 1405
  Bottom Layer w10: U3.20 1091.75,-4963.75 1252,-5124 U4.10
MCU_MISO: U3.24 U4.6 | length 1374.3
  Bottom Layer w10: U3.24 965.76,-5070.76 1052,-5157 U4.6
MCU_MOSI: U3.23 U4.7 | length 1382
  Bottom Layer w10: U3.23 997.26,-5051.26 1102,-5156 U4.7
MCU_PDN: U3.19 U4.11 | length 1412.7
  Bottom Layer w10: U3.19 1123.24,-4940.24 1302,-5119 U4.11
MCU_RF_GPIO0: U3.25 U4.2 | length 1440.2
  Bottom Layer w10: U4.2 852,-3900 872.76,-3879.24 U3.25
MCU_RF_GPIO1: U4.3
MCU_SCK: U3.22 U4.8 | length 1389.7
  Bottom Layer w10: U3.22 1028.76,-5017.76 1152,-5141 U4.8
MCU_SCL: Q6.2 U3.3 | length 2722.6
  Top Layer w12: v2(996,-3252) 996,-3397 v2(1022,-3423) ; v2(1755,-3205) v2(1755,-2943)
  Bottom Layer w12: v2(996,-3252) 1043,-3205 v2(1755,-3205) ; v2(1022,-3423) 1031,-3432 1031,-3603.37 U3.3 ; Q6.2 2049.74,-2269.74 2107,-2327 2107,-2794 2069,-2832 2028,-2832 1788,-2832 1755,-2865 v2(1755,-2943)
MCU_SDA: Q4.2 U3.7 | length 2213.1
  Top Layer w12: v2(1211,-3524) v2(1211,-3179) ; v2(1712,-3179) v2(1712,-2928)
  Bottom Layer w12: U3.7 1154.74,-3555.1 1185.84,-3524 v2(1211,-3524) ; v2(1211,-3179) v2(1712,-3179) ; v2(1712,-2928) 1712,-2820 1752,-2780 2000,-2780 2038,-2742 2038,-2544 1996,-2502 1848,-2502 1801.74,-2455.74 Q4.2
NetANT1_1: ANT1.1 U4.14 | length 126.4
  Bottom Layer w30: ANT1.1@852,-6047 U4.14
NetC2_2: C2.2 U3.5 | length 132.7
  Bottom Layer w10: U3.5 1092,-3605.36 C2.2
NetD1_1: D1.1 R9.1 | length 284.6
  Bottom Layer w15: R9.1 D1.1@578.61,-5021
NetD2_1: D2.1 R10.1 | length 167.6
  Bottom Layer w15: R10.1 D2.1@461.65,-5177
NetD3_1: D3.1 R11.1 | length 128.1
  Bottom Layer w15: R11.1 D3.1@422.09,-5335
NetD4_1: D4.1 R12.1 | length 108.6
  Bottom Layer w15: R12.1 D4.1@402.57,-5512
NetD5_1: D5.1 R13.1 | length 167.8
  Bottom Layer w15: R13.1 D5.1
NetD6_1: D6.1 R14.1 | length 96.4
  Bottom Layer w15: D6.1 1609,-4996.12 R14.1
NetD7_1: D7.1 R16.1 | length 150.5
  Bottom Layer w15: R16.1 1669,-5101 1703.54,-5135.54 D7.1
NetD8_1: D8.1 R17.1 | length 184.6
  Bottom Layer w15: R17.1 1715,-5268 1742.91,-5295.91 D8.1
NetD9_1: D9.1 R45.1 | length 214.1
  Bottom Layer w15: R45.1 1728,-5431 1762.6,-5465.6 D9.1
NetD10_1: D10.1 R46.1 | length 162.7
  Bottom Layer w15: R46.1 1680,-5607 1703.54,-5630.54 D10.1
NetF1_2: F1.2 P3.1 | length 310.3
  Top Layer w50: F1.2 1768,-2232 1802,-2198 P3.1
NetK1_1: K1.1 R15.1 | length 57
  Bottom Layer w15: R15.1@444.13,-1929.13 K1.1
NetK2_1: K2.1 R1.1 | length 73
  Bottom Layer w10: R1.1 K2.1@1563.98,-1928.94
NetK3_1: K3.1 R2.1 | length 64.7
  Bottom Layer w15: R2.1 K3.1@500.74,-3031.06
NetK4_1: K4.1 R4.1 | length 62.7
  Bottom Layer w15: R4.1 K4.1@1562.68,-3030
NetK5_1: K5.1 R5.1 | length 66
  Bottom Layer w15: R5.1 K5.1@501.04,-4134
NetK6_1: K6.1 R6.1 | length 65.4
  Bottom Layer w15: R6.1 K6.1@1563.37,-4133.06
NetK7_1: K7.1 R7.1 | length 67
  Bottom Layer w15: R7.1 K7.1@481,-4621
NetL1_1: L1.1 R18.1 | length 91.4
  Bottom Layer w10: R18.1 245.06,-236 L1.1
NetL2_1: L2.1 R20.1 | length 59.6
  Bottom Layer w10: R20.1@1763.22,-236.22 L2.1
NetL3_1: L3.1 R21.1 | length 173.8
  Top Layer w15: R21.1 244.08,-924 L3.1
NetL4_1: L4.1 R25.1 | length 56.6
  Bottom Layer w10: R25.1 L4.1@1822.64,-925
NetL5_1: L5.1 R27.1 | length 63.8
  Bottom Layer w15: R27.1 L5.1@313,-710.23
NetL6_1: L6.1 R28.1 | length 54.9
  Bottom Layer w15: R28.1 1511.42,-761.58 L6.1
NetL7_1: L7.1 R29.1 | length 79
  Bottom Layer w15: R29.1 521,-741.6 L7.1
NetL8_1: L8.1 R30.1 | length 102.9
  Bottom Layer w10: L8.1 1750.79,-744.79 1769,-763 R30.1
NetL9_1: L9.1 R31.1 | length 54.8
  Bottom Layer w10: R31.1 L9.1@1990,-708.19
NetL10_1: L10.1 R32.1 | length 95.4
  Bottom Layer w15: L10.1 1272.05,-742.05 1294,-764 R32.1
NetL11_1: L11.1 R35.1 | length 67.7
  Bottom Layer w15: R35.1 L11.1@1032,-709.34
NetL12_1: L12.1 R36.1 | length 58
  Bottom Layer w15: R36.1 L12.1@792,-709.97
NetL13_1: L13.1 R37.1 | length 53.5
  Bottom Layer w10: R37.1 L13.1@76,-709.46
NetLS1_1: LS1.1 Q5.2 | length 89.3
  Bottom Layer w10: Q5.2 LS1.1@1814,-1273
NetP4_3: P4.3 Q7.3 R47.1 | length 931.5
  Bottom Layer w10: R47.1 1603,-3494 1616.43,-3507.43 Q7.3 1582.37,-3607.63 1558.22,-3631.78 1558.22,-3829 1558.22,-3830.22 1587,-3859 1778,-3859 1824,-3905 1824,-4082.15 1838,-4096.15 P4.3
NetP4_4: P4.4 Q8.3 R48.1 | length 546.7
  Bottom Layer w10: R48.1 1587,-3807 1593.63,-3813.63 Q8.3 1822.63,-3813.63 1874,-3865 P4.4
NetP5_1: P5.1 R8.2 R39.2 R40.1 | length 397.4
  Bottom Layer w12: R8.2 1633.6,-2663.94 R39.2 R40.1 1831,-2664 1889,-2606 P5.1
NetP6_3: P6.3 R41.2 R42.1 | length 918.2
  Top Layer w12: R41.2@1473,-3408.29 R42.1 ; R41.2 1527.65,-3408.35 1561,-3375 1561,-3095 1615,-3041 1615,-2930 1645.85,-2899.15 P6.3
NetP7_5: P7.5 R43.2 R44.1 | length 240.7
  Top Layer w12: R43.2 1710,-3409.94 R44.1 P7.5@1878.7,-3338
NetP8_1: P8.1 R33.1 R34.1 | length 189
  Bottom Layer w10: P8.1@294.26,-3786.74 R34.1 ; R34.1@296,-3685.26 R33.1
NetQ1_3: Q1.3 R3.2 U1.7 | length 694.1
  Top Layer w15: U1.7 585,-2405 473.28,-2293.28 ; 473.28,-2293.28 Q1.3 428,-2293.28 473.28,-2293.28
NetQ2_3: Q2.3 R19.2 U1.8 | length 531.5
  Top Layer w15: Q2.3 R19.2@427.73,-2446.83 ; R19.2 814.56,-2446.56 823,-2455 U1.8
NetQ3_3: Q3.3 R26.2 U1.9 | length 627.7
  Top Layer w15: Q3.3 R26.2@428,-2600.37 ; R26.2 465.94,-2599.06 500,-2565 500,-2509 537.44,-2471.56 773.56,-2471.56 807,-2505 835,-2505 U1.9
NetQ4_3: Q4.3 R24.1 U2.20 | length 525.5
  Bottom Layer w10: U2.20 1505,-2255 1517,-2267 1517,-2391 1542.37,-2416.37 Q4.3
NetQ5_3: Q5.3 R23.2 | length 79.5
  Bottom Layer w10: Q5.3 1942.37,-1401.63 1959.06,-1384.94 R23.2
NetQ6_3: Q6.3 R38.1 U2.19 | length 411.8
  Bottom Layer w10: U2.19 1261.99,-2201 R38.1 1634,-2201 1645.57,-2212.57 Q6.3
PWM: U3.31
PWM_10KHZ: P7.4 U3.11 | length 1167.5
  Top Layer w12: v1(1695,-3905) 1695,-3537 1795.28,-3436.72 P7.4
  Bottom Layer w12: U3.11 1338.76,-3721.76 1409,-3792 1409,-3873 1441,-3905 v1(1695,-3905)
PWM_10KHZ1: P7.2 U3.12 | length 1051
  Top Layer w12: v1(1732,-3938) 1732,-3667 1765.43,-3633.57 P7.2
  Bottom Layer w12: U3.12 1328.25,-3753.25 1383,-3808 1383,-3902 1419,-3938 v1(1732,-3938)
PWM_50HZ: P7.1 U3.13 | length 995.8
  Top Layer w12: v1(1757,-3977) 1774,-3960 1774,-3755 1797,-3732 P7.1
  Bottom Layer w12: U3.13 1326.75,-3784.75 1359,-3817 1359,-3918 1419,-3978 1756,-3978 v1(1757,-3977)
RF_GPIO2: U4.4
RST: C1.1 P1.4 R22.1 U3.1 | length 1144.9
  Top Layer w10: P1.4 96,-3444 v2(408,-3444)
  Bottom Layer w10: v2(408,-3444) 544,-3580 861,-3580 901,-3540 C1.1 R22.1 U3.1@965.65,-3605.5
SEG1: S1.11 S2.11 U2.7 | length 2615.7
  Bottom Layer w10: U2.7 925,-2555 949,-2531 949,-2495 980,-2464 980,-2101 945,-2066 826,-1947 826,-1363.68 877.68,-1312 877.68,-1255.32 932.68,-1200.32 S2.11 932.68,-671 887,-625.32 887,-197 S1.11
SEG2: S1.7 S2.7 U2.6 | length 2983.1
  Top Layer w10: v2(956,-2605) 992,-2605 ; 978,-2605 992,-2605 ; 1287.68,-1688 1287.68,-1748.32 ; S2.7 1332.68,-1195.28 1287.68,-1240.28 1287.68,-1748.32 ; 992,-2605 1058,-2605 1081,-2582 1081,-2069 1081,-1999.72 1287.68,-1793.04 1287.68,-1748.32
  Bottom Layer w10: U2.6 v2(956,-2605) ; 1278,-206 1244,-240 ; S2.7 1328,-867 1229,-768 1229,-695 1278,-646 1278,-495 1244,-461 1244,-240 ; S1.7 1282,-202 1244,-240
SEG3: S1.4 S2.4 U2.4 | length 2517
  Top Layer w10: v2(977,-2682) v2(1053,-2682) ; S2.4 1180,-1219.68 1180,-598 S1.4
  Bottom Layer w10: U2.4 939,-2705 962,-2682 v2(977,-2682) ; v2(1053,-2682) 1053,-2054 892,-1893 892,-1507.68 S2.4
SEG4: S1.2 S2.2 U2.3 | length 2453.8
  Top Layer w10: S2.2 932.68,-980.32 981,-932 981,-599 S1.2
  Bottom Layer w10: U2.3 926,-2755 981,-2755 1004,-2732 1004,-2088 846,-1930 846,-1388 932.68,-1301.32 S2.2
SEG5: S1.1 S2.1 U2.2 | length 2418.4
  Bottom Layer w10: 809.91,-1289.77 733,-1366.68 733,-2674.64 774,-2715.64 774,-2778 801,-2805 827,-2805 ; 818,-2805 U2.2 ; S2.1 877.68,-1222 877.68,-824.68 833,-780 S1.1
SEG6: S1.10 S2.10 U2.1 | length 3029.2
  Bottom Layer w10: U2.1 967,-2855 1024,-2798 1024,-2067 867,-1910 867,-1431 983,-1315 983,-1234 1032.68,-1184.32 S2.10 1079,-820.68 1079,-672 979,-572 979,-205 S1.10
SEG7: S1.5 S2.5 U2.32 | length 2651.3
  Top Layer w10: S2.5 1232.68,-1224.32 1282,-1175 1282,-805 1233,-756 S1.5
  Bottom Layer w10: S2.5 917,-1582.68 917,-1882 1078,-2043 1078,-2459 1078,-2596 1171,-2689 1171,-2827 1199,-2855 U2.32
SEG8: S1.3 S2.3 | length 758.4
  Top Layer w10: S2.3 1032.68,-997.32 1084,-946 1084,-602 S1.3
SENSOR_SCK: Q7.2 U3.8 | length 347.2
  Bottom Layer w10: U3.8 1401.39,-3605.61 1438.74,-3568.26 Q7.2
SENSOR_SDA: Q8.2 U3.9 | length 326.5
  Bottom Layer w10: U3.9 1313,-3658.76 1357.76,-3658.76 1473.26,-3774.26 1482,-3774.26 Q8.2
STB: Q3.2 U3.32 | length 1968.3
  Top Layer w10: Q3.2 v2(289.26,-2639.74) ; v2(336,-2721) 336,-2782 310,-2808 78,-2808 42,-2844 42,-2960.28 90.72,-3009 214,-3009 229.96,-3024.96 229.96,-3103.24 369,-3242.28 v2(369,-3355)
  Bottom Layer w10: v2(289.26,-2639.74) 314.74,-2639.74 336,-2661 v2(336,-2721) ; v2(369,-3355) 369,-3440.36 397.64,-3469 398,-3469 536,-3607 783,-3607 834.76,-3658.76 U3.32
SWIM: P1.2 U3.26 | length 1464.4
  Top Layer w15: P1.2 213,-3246 v2(252,-3285)
  Bottom Layer w15: 253,-3804.28 252.88,-3804.16 ; v2@253,-3285 252.88,-3285.12 252.88,-3804.16 ; U3.26 725.26,-3847.74 646,-3927 329,-3927 252.88,-3850.88 252.88,-3804.16
VCC_3.3V: C16.1 C17.1 C18.1 C23.1 C24.1 C25.1 C34.1 C55.1 C57.2 P1.1 P8.3 Q1.1 Q2.1 Q3.1 Q4.1 Q6.1 Q7.1 Q8.1 R22.2 R33.2 U3.6 U4.5 U31.3 | length 8885.2
  Top Layer w12: v2(105,-2614) 147,-2614 171,-2590 171,-2284 201.09,-2253.91 Q1.1 ; 173.46,-2407.46 Q2.1 ; 177,-2561 Q3.1 ; v2(1352,-2923) v2(1352,-2477) ; v2(1474,-3853) v2(1474,-3647) v2@1474,-3475
  Top Layer w20: P1.1 157,-3209 241,-3209 v2(283,-3251)
  Top Layer w30: v1(426,-3600) 473,-3600 494,-3621 P8.3 494,-3823 283.5,-4033.5 283.5,-4218.5 300,-4235 v1(908,-4235) ; v1(908,-3977) 908,-3566 950.09,-3523.91 v1(1142.09,-3523.91) ; C23.1 C24.1 ; v1@1004,-5193 C24.1 ; U31.3@1044,-3239 1044,-3250 1073,-3279 C55.1 C57.2@1073,-3369.94 ; 1072.94,-3512 C57.2 ; C25.1 C24.1
  Bottom Layer w12: P1.1 94,-2625 v2(105,-2614) ; v2(1024,-2968) 1307,-2968 v2(1352,-2923) ; v2(1352,-2477) 1660,-2477 1692,-2445 1692,-2366 ; v2(1474,-3853) Q8.1 ; v2(1474,-3647) Q7.1 ; Q4.1 1703,-2377 1692,-2366 ; Q6.1 1709,-2191 1692,-2208 1692,-2366
  Bottom Layer w20: v2(283,-3251) 297,-3265 297,-3447.26 302.37,-3452.63 374.74,-3525 R33.2 ; P8.3 590,-3787 C34.1 ; R22.2 965.65,-3350.35 ; v2(1024,-2968) 965.65,-3026.35 965.65,-3350.35 ; v2(1074,-3339) 977,-3339 965.65,-3350.35 ; U3.6 1123.24,-3542.76 1149.5,-3516.5 1164,-3502 C17.1 ; C18.1 C16.1 v2(1472,-3473)
  Bottom Layer w30: R33.2 378.74,-3600 v1(426,-3600) ; v1(908,-3977) 908,-5097 v1(1002,-5191) U4.5 ; C17.1 C18.1
VCC_5V: C3.1 C4.1 C5.1 C6.1 C14.1 C15.1 C20.1 C21.1 C54.1 C56.2 D11.2 F1.1 P4.1 P6.1 R3.1 R8.1 R19.1 R23.1 R24.2 R26.1 R38.2 R47.2 R48.2 U1.10 U1.27 U2.17 U2.21 U31.2 | length 10441.6
  Top Layer w12: 318.5,-2387.5 R19.1 ; R3.1 334,-2235 316,-2253 316,-2512 344,-2540 R26.1 v2(467,-2540) ; v2(467,-2635) 530.5,-2571.5 530.5,-2511.73 547.18,-2495.06 619,-2495.06 705.06,-2495.06 721,-2511 C15.1 ; 1413,-2308 v2(1574,-2308) ; v2(1446,-3526) 1446,-3703 v2(1447,-3704) ; v2(1881,-1960) v2(1881,-1444)
  Top Layer w30: C56.2@849.06,-3197 886,-3197 ; U1.10 999,-2555 1036,-2518 1036,-1984 v1(1138,-1882) ; 886.04,-3196.96 1038.44,-3196.96 U31.2 1013.6,-3194.4
  Top Layer w40: U1.27 1400,-2355 C3.1 1406,-2351 C14.1 1406,-2236 1493,-2149 v1(1493,-2105) ; C3.1@1401,-2358 1401,-2451 1441.48,-2491.48 D11.2
  Top Layer w50: C15.1 U1.10 ; 985,-3188 985,-3106 1007,-3084 1275,-3084 1323,-3132 1455,-3132 1491.69,-3095.31 1491.69,-2855 1623,-2855 1665,-2813 1942,-2813 1983,-2854 1983,-3387 1983,-4239 1929,-4293 P4.1 ; v3(1459,-2606) C20.1 ; D11.2@1655,-2495.52 C20.1 ; D11.2 1657.52,-2493 F1.1 ; 1741,-2500 C21.1 1740,-2606 C20.1 ; P6.1 1982,-3096
  Bottom Layer w12: v2(467,-2635) v2(467,-2540) ; v2(1446,-3526) 1522,-3526 1527.94,-3520.06 R47.2 1527.94,-3463 1539.94,-3451 1598,-3451 1629.25,-3482.25 1880,-3482.25 ; v2(1447,-3704) R48.2 ; v3(1459,-2606) 1511,-2554 1680,-2554 1692.65,-2566.65 R8.1 ; v1(1493,-2105) 1736,-2105 v2(1881,-1960) ; R24.2 v2(1574,-2308) R38.2 ; v2(1881,-1444) R23.1 ; 1946.75,-3482.25 1880,-3482.25 ; v2(1979.75,-3482.25) 1880,-3482.25
  Bottom Layer w30: v1(1138,-1882) 1138,-1942 1179,-1983 C6.1 1239,-2048 1257.99,-2066.99 U2.17 1341,-2105 ; 1410,-2105 1341,-2105 ; v1(1493,-2105) 1341,-2105
  Bottom Layer w40: C5.1 C4.1
  Bottom Layer w50: U2.21 C4.1 ; v3(1459,-2606) 1459,-2656 1459,-2825 v3(1489,-2855)
  other v1: 1402.13,-2342
  other v2: 1241,-2034
pads on no net: U1.17 U1.18 U1.19 U1.20 U1.21 U1.22 U1.23 U1.24 U1.25 U1.26 U2.15 U2.18 U2.30 U2.31
copper on no net:
  other v1: 1143,-1148 1233,-1080 978,-1060 1130,-990

## Polygon pours and split planes (outlines as drawn)
GND on Top Layer "Top Layer-No Net" (solid, remove dead copper): -192,33 -94,131 2211,131 2211,-6141 2134,-6218 2102,-6186 -51,-6186 -51,-6120 -127,-6044 -54,-5971 -54,131
GND on Bottom Layer "Top Layer-No Net" (solid, remove dead copper): -239,106 -210,135 2264,135 2264,-6218 2308,-6262 2293,-6277 -181,-6277 -181,-5691 -210,-5662 -178,-5630 -178,134

## Keep-outs
Keep-Out Layer:
  circle w5: c1968.5,-5905.51 r68.9
  circle w5: c196.85,-5905.51 r68.9
  circle w5: c1968.5,-492.13 r68.9
  circle w5: c196.85,-492.13 r68.9
  lines w5: 0,-6067 0,-38 ; 0,-6062.99 ccw(c39.37,-6062.99) 39.37,-6102.36 2125.64,-6102.36 ; 0,-39.37 cw(c39.37,-39.37) 39.37,0 ; 38,0 2125,0 ; 2125.98,-6102.36 ccw(c2125.98,-6062.99) 2165.35,-6062.99 ; 2125.98,0 cw(c2125.98,-39.37) 2165.35,-39.37 ; 2165.35,-6062.65 2165.35,-40.35

## Silkscreen, mask and mechanical layers (free items; w line width, h text height)
Mechanical 1:
  circle w5: c1968.5,-5905.51 r68.9
  circle w5: c196.85,-5905.51 r68.9
  circle w5: c1968.5,-492.13 r68.9
  circle w5: c196.85,-492.13 r68.9
  lines w5: 2125,0 39.37,0 ccw(c39.37,-39.37) 0,-39.37 0,-6062.99 ccw(c39.37,-6062.99) 39.37,-6102.36 2125.64,-6102.36 ; 2125.98,-6102.36 ccw(c2125.98,-6062.99) 2165.35,-6062.99 ; 2125.98,0 cw(c2125.98,-39.37) 2165.35,-39.37 ; 2165.35,-6062.65 2165.35,-40.35

## Text inside footprints (layer, text, board x,y; h text height)
D1: Top Overlay "+" at 495.92,-5038.68 h40
D2: Top Overlay "+" at 377.81,-5196.17 h40
D3: Top Overlay "+" at 338.44,-5353.65 h40
D4: Top Overlay "+" at 318.76,-5530.81 h40
D5: Top Overlay "+" at 377.81,-5707.98 h40
D6: Top Overlay "+" at 1669.43,-5000.68 h40 r180
D7: Top Overlay "+" at 1787.54,-5158.17 h40 r180
D8: Top Overlay "+" at 1826.91,-5316 h40 r180
D9: Top Overlay "+" at 1846.6,-5492.81 h40 r180
D10: Top Overlay "+" at 1787.54,-5669.98 h40 r180
K1: Top Overlay "+" at 428.18,-1958.13 h40
K2: Top Overlay "+" at 1491.17,-1958.13 h40
K3: Top Overlay "+" at 428.18,-3060.5 h40
K4: Top Overlay "+" at 1491.17,-3060.5 h40
K5: Top Overlay "+" at 428.18,-4162.86 h40
K6: Top Overlay "+" at 1491.17,-4162.86 h40
K7: Top Overlay "+" at 409,-4649 h40
L1: Top Overlay "+" at 172.28,-265.22 h40
L2: Top Overlay "+" at 1749.83,-265.22 h40
L3: Top Overlay "+" at 172.28,-954.2 h40
L4: Top Overlay "+" at 1749.83,-954.2 h40
L5: Top Overlay "+" at 230.57,-727.66 h40
L6: Top Overlay "+" at 1427.42,-727.66 h40
L7: Top Overlay "+" at 469.94,-727.66 h40
L8: Top Overlay "+" at 1666.79,-727.66 h40
L9: Top Overlay "+" at 1906.16,-727.03 h40
L10: Top Overlay "+" at 1188.05,-727.66 h40
L11: Top Overlay "+" at 948.68,-727.66 h40
L12: Top Overlay "+" at 709.31,-727.66 h40
L13: Top Overlay "+" at -8.8,-727.66 h40
LS1: Top Overlay "+" at 1799,-1201 h40 r270